# Allegro board INSONA ZAP.brd
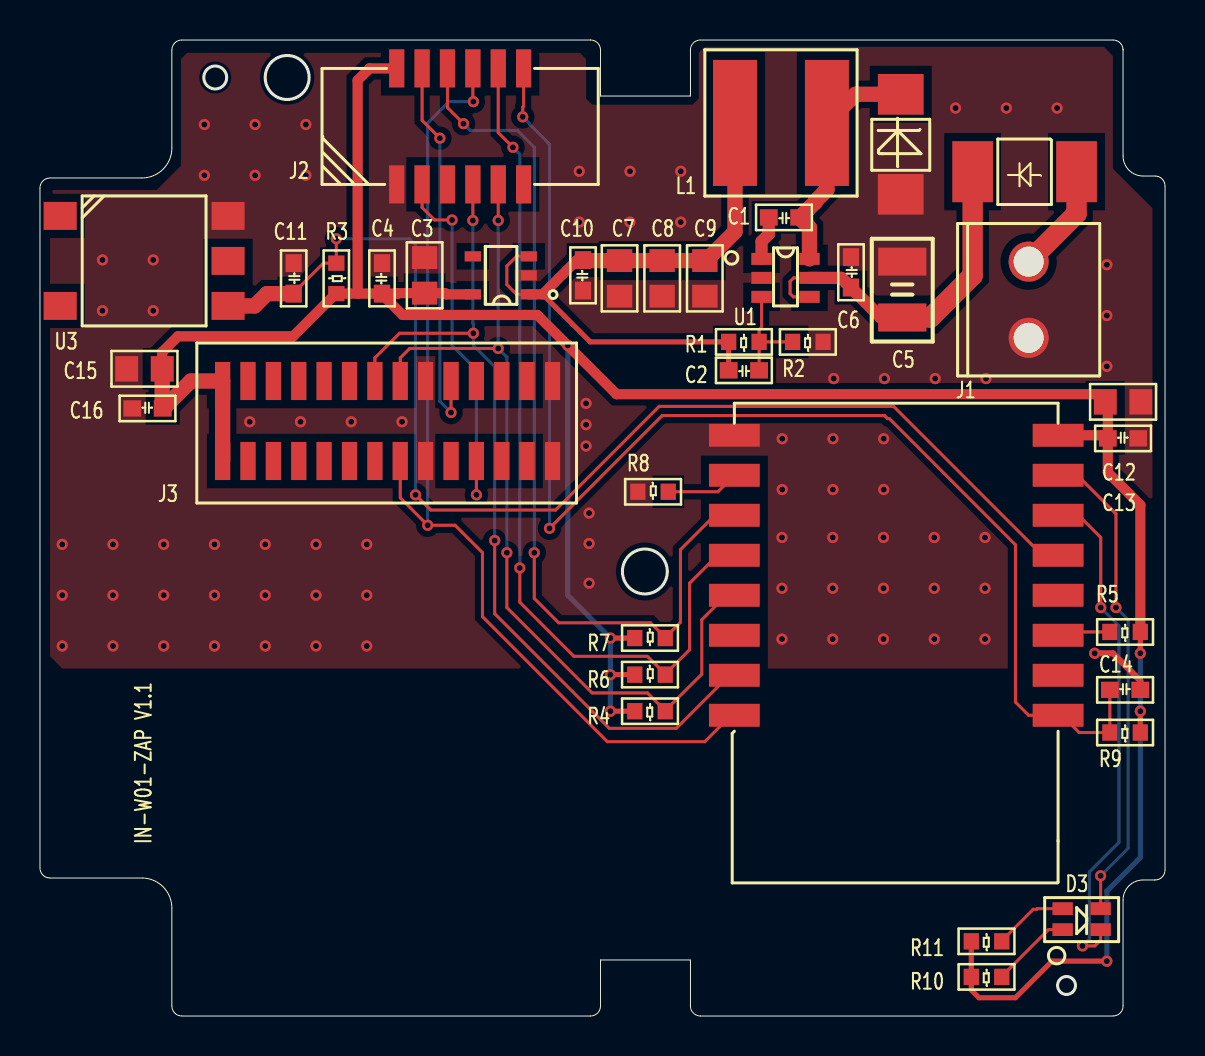
[diagram p0: board, top side]
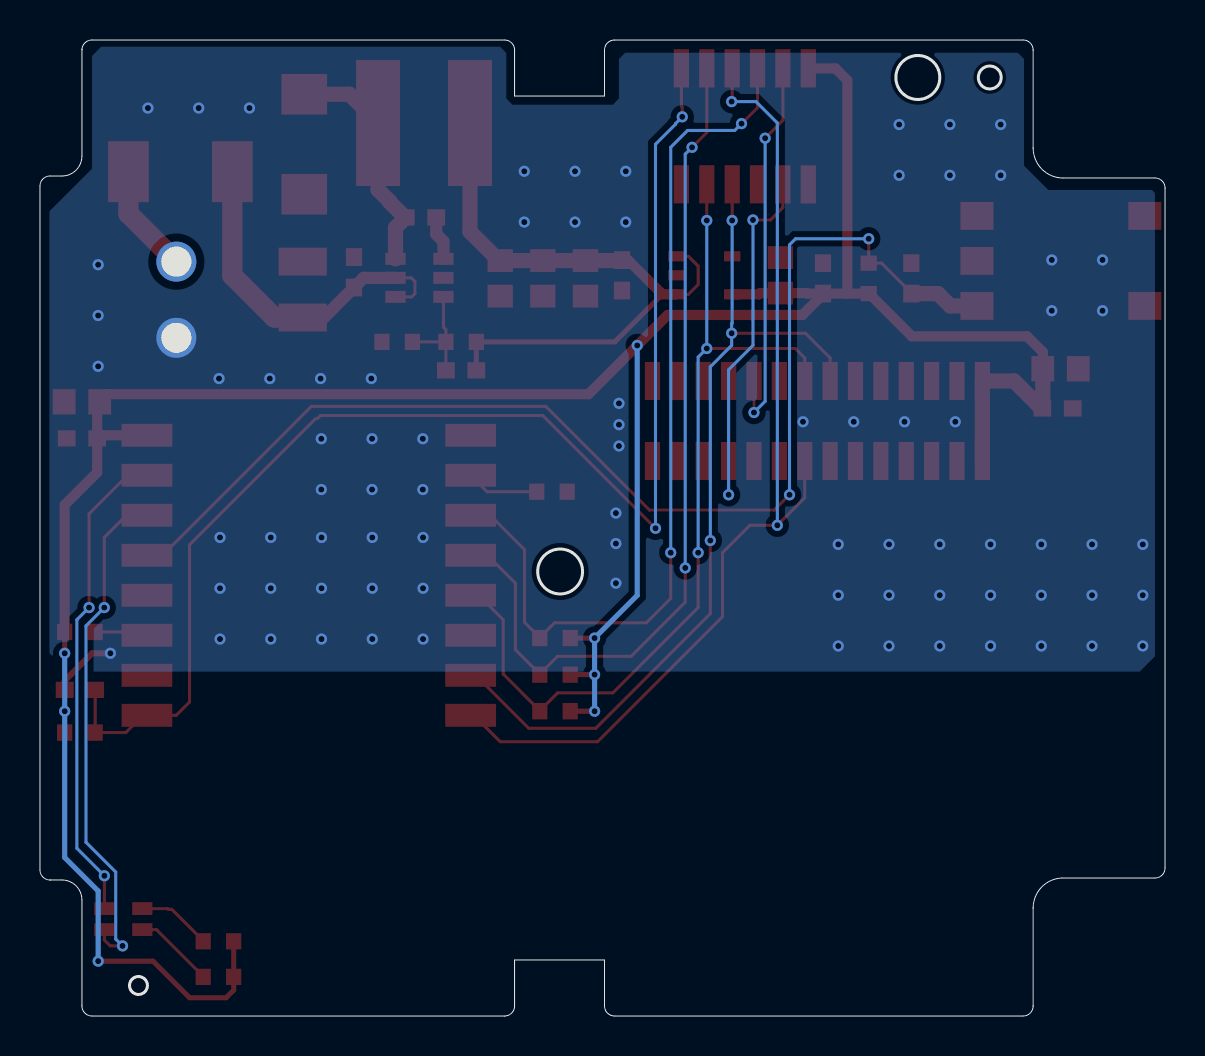
[diagram p1: board, bottom side, seen from below]

Outline 56.3 x 48.8 mm; copper layers: TOP, BOTTOM. Coordinates in mm from the lower left corner of the outline.
Outline path: circle c8.77,46.93 r0.57 ; circle c12.37,46.93 r1.1 ; circle c30.27,22.23 r1.12 ; circle c51.37,1.53 r0.45 ; 0,41.4 0,7.4 arc(0.15,7.05) 0.5,6.9 5.15,6.9 arc(6.18,6.44) 6.6,5.4 6.6,0.5 arc(6.75,0.15) 7.1,0 27.54,0 arc(27.9,0.14) 28.05,0.49 ; 0,41.39 arc(0.14,41.74) 0.49,41.9 ; 0.5,41.9 5.1,41.9 arc(6.16,42.34) 6.6,43.4 6.6,48.3 arc(6.75,48.65) 7.1,48.8 27.55,48.8 ; 27.55,48.8 arc(27.9,48.65) 28.05,48.3 28.05,46 32.55,46 32.55,48.3 ; 28.05,0.5 28.05,2.8 32.55,2.8 32.55,0.5 arc(32.7,0.15) 33.05,0 53.7,0 ; 32.55,48.29 arc(32.69,48.64) 33.04,48.8 ; 53.7,48.8 arc(54.05,48.65) 54.2,48.3 ; 53.7,48.8 33.05,48.8 ; 54.2,48.35 54.2,43 arc(54.49,42.29) 55.2,42 55.8,42 arc(56.15,41.85) 56.3,41.5 56.3,7.3 ; 54.2,0.5 arc(54.06,0.15) 53.7,0 ; 54.2,0.5 54.2,5.8 arc(54.49,6.51) 55.2,6.8 55.79,6.8 arc(56.15,6.94) 56.3,7.29

## Design rules (mm)
nets with their own width: min track width 0.254; nets +3.3V
nets with their own width: min track width 0.305; nets GND

## Placement (name value [footprint] x y rotation side)
C1  0.1uF-SC0603  [SC0603]  37.23 39.93 180 top
C2  NC-47pF-SC0603  [SC0603]  35.23 32.28 180 top
C3  10uF-SC0805  [SC0805]  19.25 37.03 270 top
C4  0.1uF-SC0603  [SC0603]  17.12 36.88 90 top
C5  22uF-SC1210  [SC1210]  43.15 36.32 270 top
C6  0.1uF-SC0603-50V  [SC0603]  40.59 37.19 270 top
C7  10uF-SC0805  [SC0805]  29 36.88 90 top
C8  10uF-SC0805  [SC0805]  31.14 36.88 90 top
C9  10uF-SC0805  [SC0805]  33.27 36.88 90 top
C10  0.1uF-SC0603  [SC0603]  27.17 37.03 90 top
C11  0.1uF-SC0603  [SC0603]  12.7 36.88 270 top
C12  10uF-SC0805  [SC0805]  54.2 30.71 0 top
C13  0.1uF-SC0603  [SC0603]  54.2 28.88 0 top
C14  0.1uF-SC0603  [SC0603]  54.3 16.31 0 top
C15  10uF-SC0805  [SC0805]  5.23 32.36 180 top
C16  0.1uF-SC0603  [SC0603]  5.38 30.38 0 top
D1  M7  [DO-213AB]  49.27 42.21 180 top
D2  B340A  [SMA]  43.07 43.59 90 top
D3  -  [LED_TWO]  51.18 4.32 180 top
J1  CON2  [ME02-381-2]  49.48 37.72 180 top
J2  CON12A  [CON2X6_127_BOX]  17.85 41.58 0 top
J3  J14x2  [CORE_BOARD1]  9.14 31.75 180 top
L1  10uH  [L5828]  37.08 44.65 270 top
NOREF  -  []  53.92 0.01 90 top
NOREF#2  -  []  0 7.4 90 top
NOREF#3  -  []  0 28.79 0 top
R1  100k-SR0603  [SR0603]  35.23 33.71 180 top
R2  13.7k-SR0603  [SR0603]  38.43 33.71 180 top
R3  10K-SR0603  [SR0603]  14.83 36.88 270 top
R4  10K-SR0603  [SR0603]  30.53 15.24 180 top
R5  10K-SR0603  [SR0603]  54.3 19.2 180 top
R6  10K-SR0603  [SR0603]  30.53 17.07 0 top
R7  10K-SR0603  [SR0603]  30.53 18.9 0 top
R8  10K-SR0603  [SR0603]  30.68 26.21 0 top
R9  10K-SR0603  [SR0603]  54.3 14.17 180 top
R10  510-SR0603  [SR0603]  47.37 1.96 180 top
R11  510-SR0603  [SR0603]  47.37 3.73 180 top
U1  SY8291  [SOT-23-6L]  37.31 36.91 0 top
U2  SPX3819  [SOT23-5]  23.06 37.03 180 top
U3  BUTTON  [SKHMQLE010]  1.01 40 0 top
U4  ESP-12s  [ESP-12S]  50.95 15.04 90 top

## Library data of the parts
C1-C16 = CAP NP
D1 = DIODE ZENER
D2 = DIODE
D3 = LED_TWO
J1 = CON2
J2 = CON12A
J3 = J14*2
L1 = INDUCTOR
R1-R11 = R
U1 = SY8120B1
U2 = SPX3819
U3 = BUTTON_0
U4 = ESP-07

## Footprints (pads in the part's own frame, mm; a bottom-side part is the same pattern mirrored in y, then rotated)
CON2X6_127_BOX
  rect 0.762x1.905 smd: 1(0,0) 2(0,5.8) 3(1.27,0) 4(1.27,5.8) 5(2.54,0) 6(2.54,5.8) 7(3.81,0) 8(3.81,5.8) 9(5.08,0) 10(5.08,5.8) 11(6.35,0) 12(6.35,5.8)
CORE_BOARD1
  rect 0.762x1.905 smd: 1(0,0) 2(0,4) 3(-1.27,0) 4(-1.27,4) 5(-2.54,0) 6(-2.54,4) 7(-3.81,0) 8(-3.81,4) 9(-5.08,0) 10(-5.08,4) 11(-6.35,0) 12(-6.35,4) 13(-7.62,0) 14(-7.62,4) 15(-8.89,0) 16(-8.89,4) 17(-10.16,0) 18(-10.16,4) 19(-11.43,0) 20(-11.43,4) 21(-12.7,0) 22(-12.7,4) 23(-13.97,0) 24(-13.97,4) 25(-15.24,0) 26(-15.24,4) 27(-16.51,0) 28(-16.51,4)
DO-213AB
  rect 2.032x3.048 smd: 1(-2.6,0) 2(2.6,0)
ESP-12S
  rect 1.143x2.54 smd: 1(0,0) 2(2,0) 3(4,0) 4(6,0) 5(8,0) 6(10,0) 7(12,0) 8(14,0) 9(14,16.2) 10(12,16.2) 11(10,16.2) 12(8,16.2) 13(6,16.2) 14(4,16.2) 15(2,16.2) 16(0,16.2)
L5828
  rect 6.3x2.2 smd: 1(0,2.3) 2(0,-2.3)
LED_TWO
  rect 1.016x0.635 smd: 1(0,0) 2(-1.9,0) 3(0,-1.05) 4(-1.9,-1.05)
ME02-381-2
  round 2 hole 1.5: 1(0,0) 2(0,3.81)
SC0603
  rect 0.889x0.813 smd: 1(-0.762,0) 2(0.762,0)
SC0805
  rect 1.143x1.27 smd: 1(-0.889,0) 2(0.889,0)
SC1210
  rect 1.397x2.413 smd: 1(-1.397,0) 2(1.397,0)
SKHMQLE010
  rect 1.651x1.397 smd: 1(0,0) 2(8.4,0) 3(0,-4.5) 4(8.4,-4.5) 5(8.4,-2.25)
SMA
  rect 2.032x2.286 smd: 1(-2.5,0) 2(2.5,0)
SOT23-5
  rect 0.813x0.508 smd: 1(-1.4,0.95) 2(-1.4,0) 3(-1.4,-0.95) 4(1.4,-0.95) 5(1.399,0.95)
SOT-23-6L
  rect 1.016x0.6 smd: 1(-1.2,0.95) 2(-1.2,0) 3(-1.2,-0.95) 4(1.2,-0.95) 5(1.2,0) 6(1.2,0.95)
SR0603
  rect 0.762x0.813 smd: 1(-0.762,0) 2(0.762,0)

## Nets
+3.3V: C3.2 C4.1 C12.1 C13.1 C15.1 C16.2 J2.2 J3.1 J3.2 R3.2 R4.2 R5.1 R6.1 R7.1 R9.1 R10.2 R11.2 U2.5(VOUT) U4.8(VCC)
+5V: C2.2 C7.2 C8.2 C9.2 C10.2 L1.2 R1.2 U2.1(VI N) U2.3(EN)
GND: C3.1 C4.2 C5.1 C6.1 C7.1 C8.1 C9.1 C10.1 C11.1 C12.2 C13.2 C14.2 C15.2 C16.1 D2.1(A) J1.2 J2.1 J3.17 J3.18 J3.27 J3.28 R2.1 R8.1 U1.2(GND) U2.2(GND) U3.2 U4.9(GND)
VCC: C5.2 C6.2 D1.2(CATHODE) U1.4(EN) U1.5(IN)
BUTTON1: C11.2 R3.1 U3.4 U4.5(GPIO14)
GPIO0: J2.10 R6.2 U4.12(GPIO0)
IO2: J2.6 R7.2 U4.11(GPIO2)
JTCK: J2.4 J3.19
JTMS: J2.3 J3.22
LED1: D3.2 U4.6(GPIO12)
LED2: D3.4 U4.7(GPIO13)
NRST: J2.9 J3.15 R4.1 U4.13(GPIO4)
RXD: J2.7 J3.13 U4.15(RXD)
TXD: J2.8 J3.16 U4.16(TXD)
WIFI_RST: C14.1 J2.12 R9.2 U4.1(RESET)
N1023102: R8.2 U4.10(GPIO15)
N1024136: D3.3 R11.1
N1024180: D3.1 R10.1
N1024868: C2.1 R1.1 R2.2 U1.3(FB)
N1024892: C1.1 D2.2(K) L1.1 U1.6(LX)
N1024924: C1.2 U1.1(BS)
N1043327: R5.2 U4.3(CH_PD)
N1060352: D1.1(ANODE) J1.1

Pads without a net: J2 5 11; J3 3 4 5 6 7 8 9 10 11 12 14 20 21 23 24 25 26; U2 4; U3 1 3 5; U4 2 4 14

## Via types
v1: diameter 0.559, hole 0.305, TOP to BOTTOM, 110 vias

## Routing (per net, layer and track width the routed paths; a pad name or vN(x,y) marks a point on that pad's centre or on a via; arc(x,y) is an arc through that point)
+3.3V: length 144.5
  TOP w0.254: R5.1 v1(55.06,18.14) ; R11.2 R10.2 46.6,1.3 46.99,0.91 48.81,0.91 50.64,2.74 v1(53.39,2.74) ; R7.1 v1(28.55,18.9) ; v1(28.55,17.07) R6.1 ; R4.2 v1(28.55,15.24) ; v1(55.06,15.24) R9.1
  TOP w0.508: C13.1 53.28,29.04 U4.8 ; C13.1 53.44,30.58 C12.1 52.93,31.09 28.85,31.09 v1(26.41,33.53) 24.89,35.05 18.14,35.05 17.12,36.08 C4.1 ; C13.1 53.44,27.18 55.06,25.55 R5.1 ; C4.1 17.9,36.12 17.93,36.14 C3.2 20.27,36.14 20.33,36.08 U2.5 ; C4.1 15.9,36.12 ; J2.2 16.49,47.38 15.9,46.79 15.9,36.12 ; 15.9,36.12 R3.2 14.8,36.12 12.67,33.99 6.9,33.99 6.12,33.2 C15.1
  TOP w0.762: C15.1 6.12,30.4 C16.2 6.18,30.38 7.55,31.75 J3.1 J3.2
  BOTTOM w0.254: v1(53.39,2.74) 53.39,6.25 55.06,7.92 v1(55.06,15.24) v1(55.06,18.14) ; v1(26.41,33.53) 26.41,21.03 v1(28.55,18.9) v1(28.55,17.07) v1(28.55,15.24)
+5V: length 32.3
  TOP w0.152: U2.1 23.85,36.08 23.36,36.57 23.36,37.5 23.85,37.98 U2.3
  TOP w0.254: C2.2 R1.2 27.53,33.71 25.16,36.08
  TOP w0.508: U2.1 25.16,36.08 26.87,37.8 C10.2
  TOP w0.762: L1.2 34.78,39.22 33.33,37.77 C9.2 C8.2 C7.2 27.2,37.77 C10.2
GND: length 3.3
  TOP w0.305: v1(52.78,18.14) 53.69,18.14 55.06,16.76 C14.2
  vias: v1(1.11,23.58) v1(1.11,21.04) v1(1.11,18.5) v1(3.13,37.8) v1(3.13,35.26) v1(3.65,23.58) v1(3.65,21.04) v1(3.65,18.5) v1(5.67,37.8) v1(5.67,35.26) v1(6.19,23.58) v1(6.19,21.04) v1(6.19,18.5) v1(8.23,44.57) v1(8.23,42.03) v1(8.73,23.58) v1(8.73,21.04) v1(8.73,18.5) v1(10.5,29.71) v1(10.77,44.57) v1(10.77,42.03) v1(11.27,23.58) v1(11.27,21.04) v1(11.27,18.5) v1(13.04,29.71) v1(13.31,44.57) v1(13.31,42.03) v1(13.81,23.58) v1(13.81,21.04) v1(13.81,18.5) v1(15.58,29.71) v1(16.35,23.58) v1(16.35,21.04) v1(16.35,18.5) v1(18.12,29.71) v1(26.99,42.24) v1(26.99,39.7) v1(27.33,30.63) v1(27.33,29.57) v1(27.33,28.5) v1(27.48,25.15) v1(27.48,23.62) v1(27.48,21.64) v1(29.53,42.24) v1(29.53,39.7) v1(32.07,42.24) v1(32.07,39.7) v1(37.14,28.86) v1(37.14,26.32) v1(37.13,23.93) v1(37.13,21.39) v1(37.13,18.85) v1(39.72,31.87) v1(39.68,28.86) v1(39.68,26.32) v1(39.67,23.93) v1(39.67,21.39) v1(39.67,18.85) v1(42.26,31.87) v1(42.22,28.86) v1(42.22,26.32) v1(42.21,23.93) v1(42.21,21.39) v1(42.21,18.85) v1(44.75,23.93) v1(44.75,21.39) v1(44.75,18.85) v1(44.8,31.87) v1(45.82,45.4) v1(47.34,31.87) v1(47.29,23.93) v1(47.29,21.39) v1(47.29,18.85) v1(48.36,45.4) v1(50.9,45.4) v1(53.39,37.56) v1(53.39,35.02) v1(53.39,32.48)
VCC: length 17.7
  TOP w0.152: U1.4 37.7,35.96 37.54,36.12 37.54,36.73 37.71,36.91 U1.5
  TOP w0.61: C5.2 42.08,34.92 C6.2 40.1,36.91 U1.5
  TOP w1.016: C5.2 44.57,34.92 46.67,37.02 D1.2
BUTTON1: length 61.8
  TOP w0.152: C11.2 12.7,36.16 14.18,37.64 R3.1 v1(14.83,38.86) ; v1(18.79,26.06) 19.55,25.3 25.8,25.3 30.98,30.48 42.72,30.48 50.16,23.04 U4.5
  TOP w0.762: C11.2 11.36,36.12 10.75,35.51 U3.4
  BOTTOM w0.152: v1(14.83,38.86) 18.49,38.86 18.79,38.56 v1(18.79,26.06)
GPIO0: length 43.8
  TOP w0.152: v1(24.01,22.4) 24.01,20.69 26.72,17.98 30.4,17.98 31.29,17.09 ; 31.29,17.09 R6.2 ; 31.29,17.09 32.51,18.31 32.51,21.64 33.9,23.04 U4.12 ; J2.10 22.93,44.17 v1(23.67,43.43)
  BOTTOM w0.152: v1(23.67,43.43) 24.01,43.09 v1(24.01,22.4)
IO2: length 45.2
  TOP w0.152: v1(24.74,23.16) 24.74,20.88 25.95,19.66 30.55,19.66 31.29,18.92 ; J2.6 20.39,45.42 v1(21.19,44.62) ; 31.29,18.92 32.05,19.68 32.05,23.32 33.77,25.04 U4.11 ; 31.29,18.92 R7.2
  BOTTOM w0.152: v1(24.74,23.16) 24.74,43.43 23.89,44.28 21.54,44.28 v1(21.19,44.62)
JTCK: length 19.4
  TOP w0.152: J2.4 19.12,44.78 v1(20.01,43.89) ; J3.19 v1(20.57,30.18)
  BOTTOM w0.152: v1(20.57,30.18) 20.01,30.73 v1(20.01,43.89)
JTMS: length 18.8
  TOP w0.152: J2.3 19.12,40.42 19.74,39.8 v1(20.62,39.8) ; v1(21.84,26.06) J3.22
  BOTTOM w0.152: v1(21.84,26.06) 21.84,32.31 20.62,33.53 v1(20.62,39.8)
LED1: length 25.7
  TOP w0.152: U4.6 51.97,25.04 53.08,23.93 v1(53.08,20.42) ; D3.2 53.08,3.8 52.78,3.51 v1(52.17,3.51)
  BOTTOM w0.152: v1(52.17,3.51) 52.51,3.85 52.51,7.2 54,8.69 54,19.51 v1(53.08,20.42)
LED2: length 24.3
  TOP w0.152: U4.7 51.91,27.04 53.84,25.11 v1(53.84,20.42) ; v1(53.08,7.01) D3.4
  BOTTOM w0.152: v1(53.08,7.01) 54.45,8.39 54.45,19.81 v1(53.84,20.42)
NRST: length 45.1
  TOP w0.152: U4.13 34.34,21.04 33.12,19.81 33.12,17.09 31.29,15.27 ; R4.1 31.29,15.27 ; 31.29,15.27 30.4,16.15 27.63,16.15 23.36,20.42 v1(23.36,23.16) ; J3.15 18.03,32.91 18.5,33.38 v1(22.93,33.38) ; J2.9 v1(22.93,39.78)
  BOTTOM w0.152: v1(23.36,23.16) 23.36,32.94 v1(22.93,33.38) v1(22.93,39.78)
RXD: length 44
  TOP w0.152: v1(22.75,23.77) 22.75,20.12 28.49,14.38 31.84,14.38 34.49,17.04 U4.15 ; v1(21.69,34.14) 17.99,34.14 16.76,32.91 J3.13 ; J2.7 v1(21.66,39.78)
  BOTTOM w0.152: v1(21.66,39.78) 21.66,34.65 21.69,34.62 v1(21.69,34.14) 21.69,33.53 22.75,32.46 v1(22.75,23.77)
TXD: length 50.5
  TOP w0.152: v1(21.69,45.72) 21.66,45.75 J2.8 ; J3.16 18.03,25.91 v1(19.4,24.54) 20.77,24.54 22.14,23.16 22.14,19.96 28.39,13.72 33.27,13.72 34.59,15.04 U4.16
  BOTTOM w0.152: v1(21.69,45.72) 20.47,45.72 19.4,44.65 v1(19.4,24.54)
WIFI_RST: length 67.2
  TOP w0.152: v1(25.5,24.38) 31.14,30.02 42.26,30.02 42.41,29.87 42.5,29.87 48.81,23.56 48.81,15.7 49.48,15.04 U4.1 51.14,15.04 52,14.17 R9.2 C14.1 ; J2.12 24.2,45.48 24.16,45.44 v1(24.16,44.96)
  BOTTOM w0.152: v1(24.16,44.96) 24.5,44.62 24.5,44.58 25.5,43.59 v1(25.5,24.38)
N1023102: length 3.6
  TOP w0.152: R8.2 33.92,26.21 U4.10
N1024136: length 3.7
  TOP w0.152: R11.1 48.13,3.76 49.7,5.33 49.88,5.33 49.92,5.37 D3.3
N1024180: length 4
  TOP w0.152: R10.1 48.13,1.98 50.47,4.32 D3.1
N1024868: length 5.4
  TOP w0.152: U1.3 36.11,34.44 35.99,34.32 R1.1 ; R2.2 R1.1 ; R1.1 C2.1
N1024892: length 11.9
  TOP w0.762: D2.2 40.81,46.09 L1.1 39.38,41.31 38.8,40.73 38.8,40.69 38.03,39.93 C1.1 38.51,39.41 U1.6
N1024924: length 2.2
  TOP w0.61: U1.1 36.11,38.73 36.47,39.09 C1.2
N1043327: length 2.7
  TOP w0.152: R5.2 51.11,19.2 U4.3
N1060352: length 5.5
  TOP w1.016: D1.1 51.87,40.12 J1.1

## Copper pours and planes (outline as drawn; the poured copper is in the pictures)
GND on TOP: 49.55,22.02 49.37,22.2 49.26,22.22 49.2,22.13 49.2,17.37 1.11,17.37 0.5,17.98 0.5,41.15 0.66,41.3 5.84,41.3 7.06,42.52 7.06,47.85 7.36,48.16 11.8,48.16 12.37,45.57 12.94,48.16 27.02,48.16 27.33,47.85 27.33,45.87 27.63,45.57 32.66,45.57 32.97,45.87 32.97,48.16 33.27,48.46 53.23,48.46 53.69,48.01 53.69,42.37 55.67,40.39 55.67,18.37 55.64,18.32 55.63,18.27 55.31,17.61 54.6,17.79 54.58,17.81 54.5,17.81 54.5,17.93 54.38,17.93 54.46,17.97 54.49,18.05 54.48,18.16 54.49,18.27 54.47,18.35 54.39,18.39 52.75,18.39 52.75,18.82 52.17,18.82 52.02,18.66 52.02,17.37 49.68,17.37 49.68,17.42 49.78,17.42 49.78,23.45 49.68,23.45 49.68,29.2 52.03,29.2 52.03,30.01 52.33,30.01 52.33,30.53 44.06,30.53 43.97,30.47 43.99,30.36 44.27,30.07 42.82,30.07 42.72,30.01 42.74,29.9 49.5,23.14 49.59,23.11 49.66,23.15 49.65,23.14 49.65,21.91 49.59,21.98 49.55,21.94 49.52,21.98 ; 8 cut-outs
GND on BOTTOM: 0.5,17.98 0.5,41.15 0.66,41.3 5.84,41.3 7.06,42.52 7.06,47.85 7.36,48.16 11.8,48.16 12.37,45.57 12.94,48.16 27.02,48.16 27.33,47.85 27.33,45.87 27.63,45.57 32.66,45.57 32.97,45.87 32.97,48.16 33.27,48.46 53.23,48.46 53.69,48.01 53.69,42.37 55.83,40.23 55.83,18.14 54.91,17.22 1.27,17.22 ; 6 cut-outs

## Text on the board
Ref Des/Silkscreen Top: IN-W01-ZAP V1.1
User.8: FIGURE | SIZE | 0.3048 | 1.5001 | DRILL CHART: TOP to BOTTOM | ALL UNITS ARE IN MILLIMETERS | PLATED | QTY | 110 | 2
User.13: {\Fgdt;n}\Ftxt;2,2 | 21,65 | 12,8 | 56,3 | 29 | 49,2 | {\Fgdt;n}\Ftxt;0,94 | 4,5
User.14: {\Fgdt;n}\Ftxt;2,2 | 21,65 | 12,8 | 56,3 | 29 | 48,8 | {\Fgdt;n}\Ftxt;0,94 | 4,5
User.15: 1,9 | 2,2 | {\Fgdt;n}\Ftxt;2,2 | 21,65 | 12,8 | 56,3 | 29 | 48,8 | {\Fgdt;n}\Ftxt;0,94 | 4,5 | 2,8
